# Altium PCB LineSensorBoardPCB.PcbDoc
Units mm, origin at the board's own origin, x right, y up, seen from the top; angles counter-clockwise.
Board outline 50 x 70 mm, 2 copper layers (Top Layer, Bottom Layer); 77 components, 53 nets, 266 pads, 6 vias.
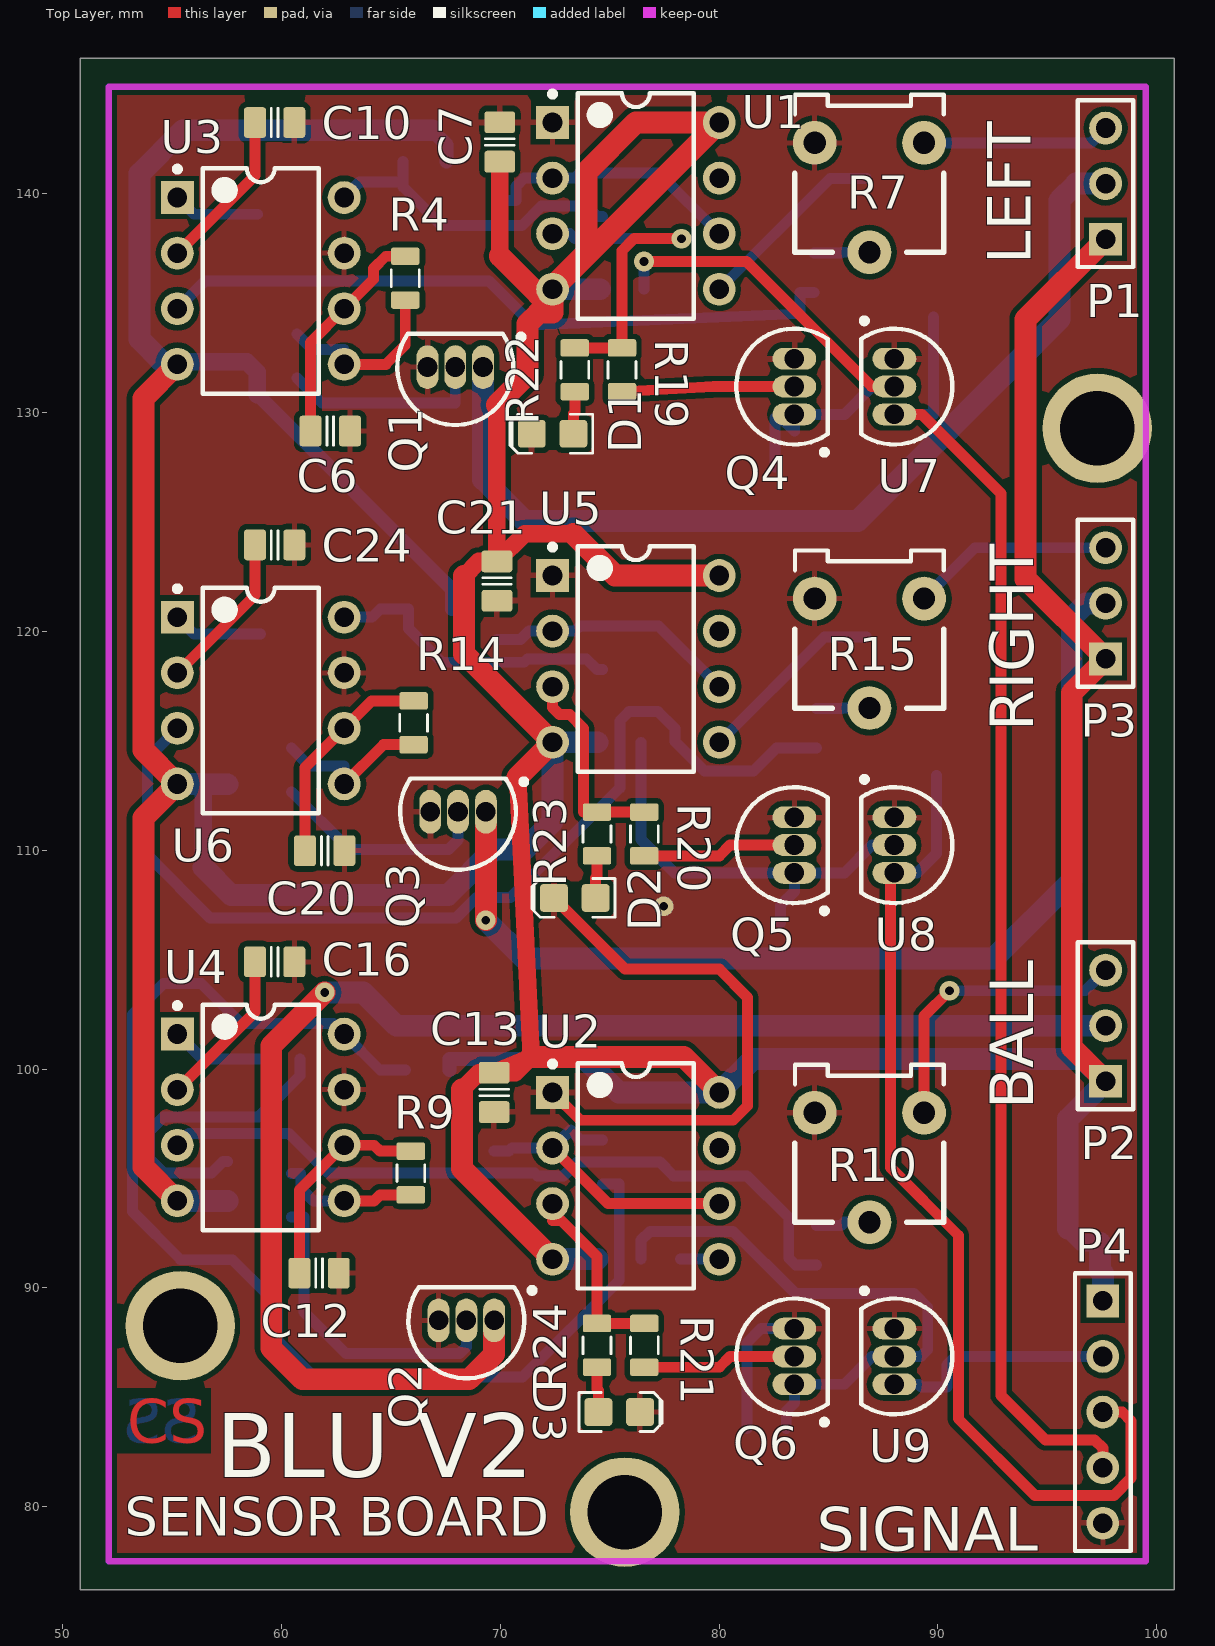
[diagram p0: Top Layer view]
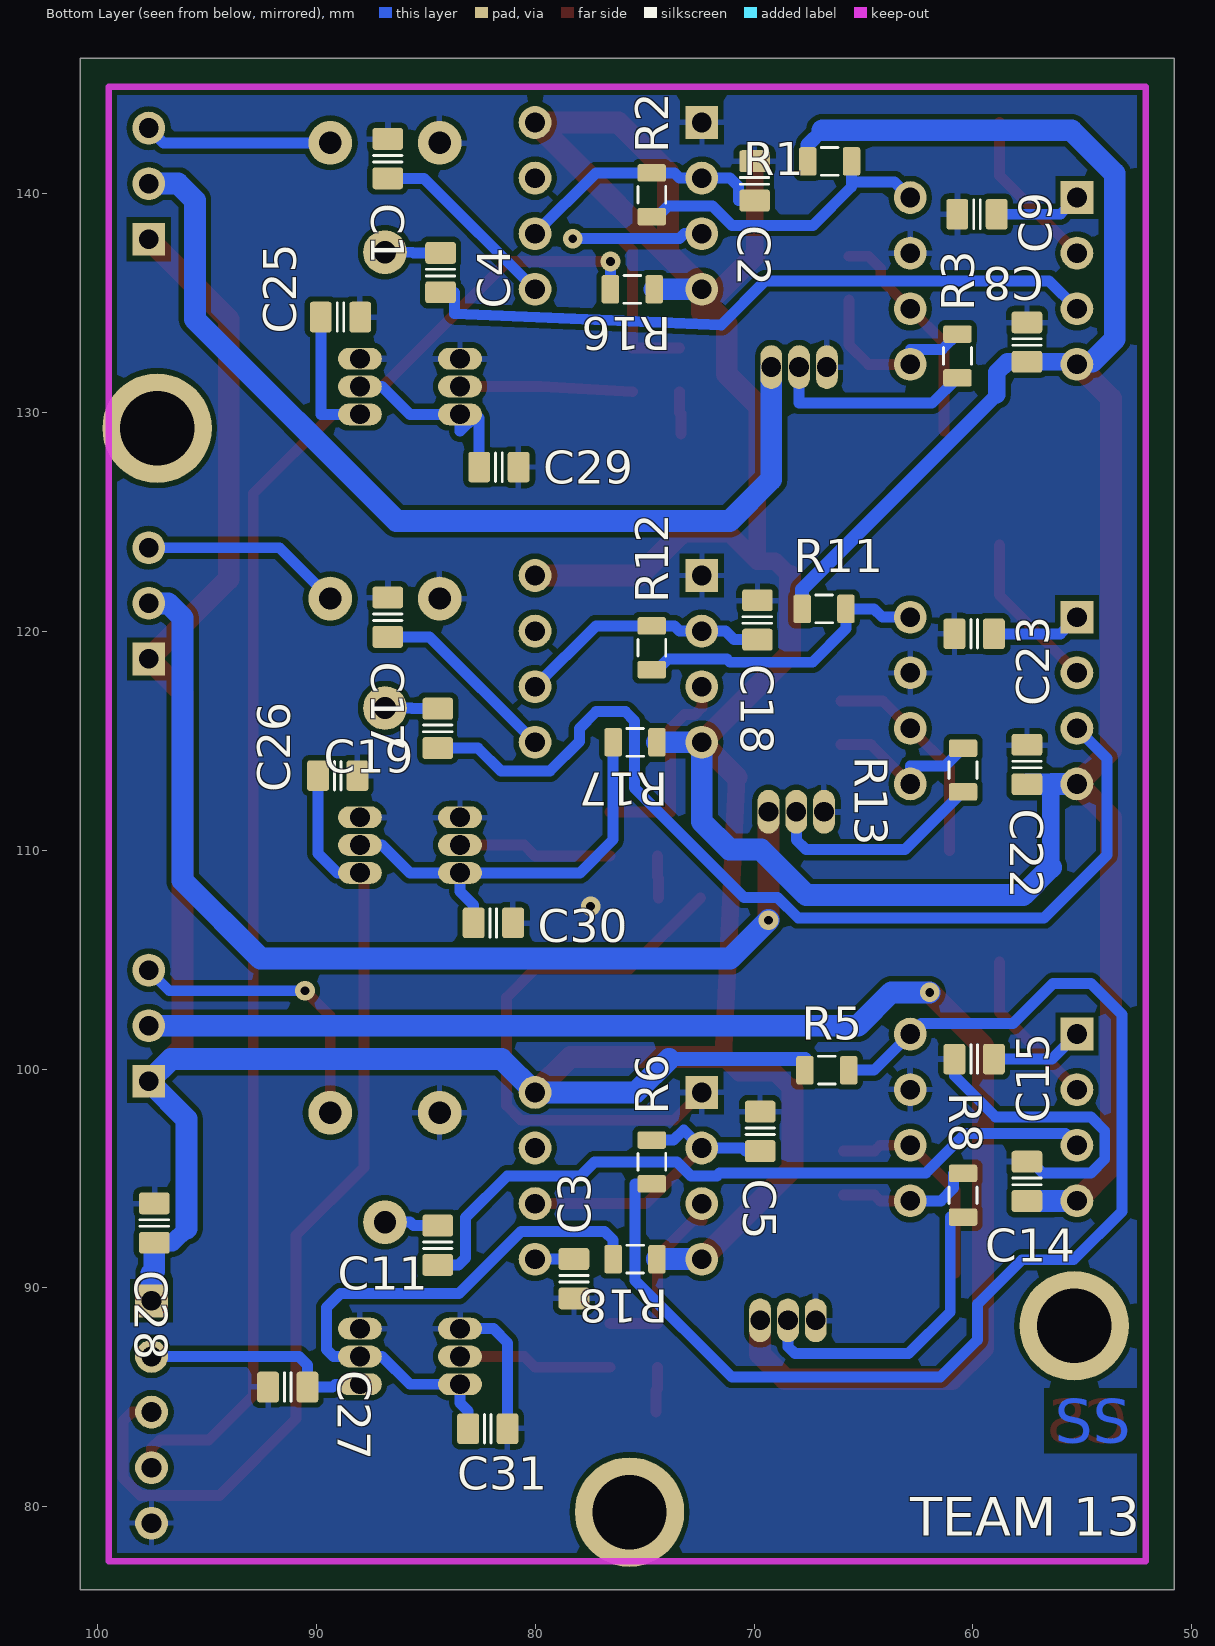
[diagram p1: Bottom Layer view, seen from below]
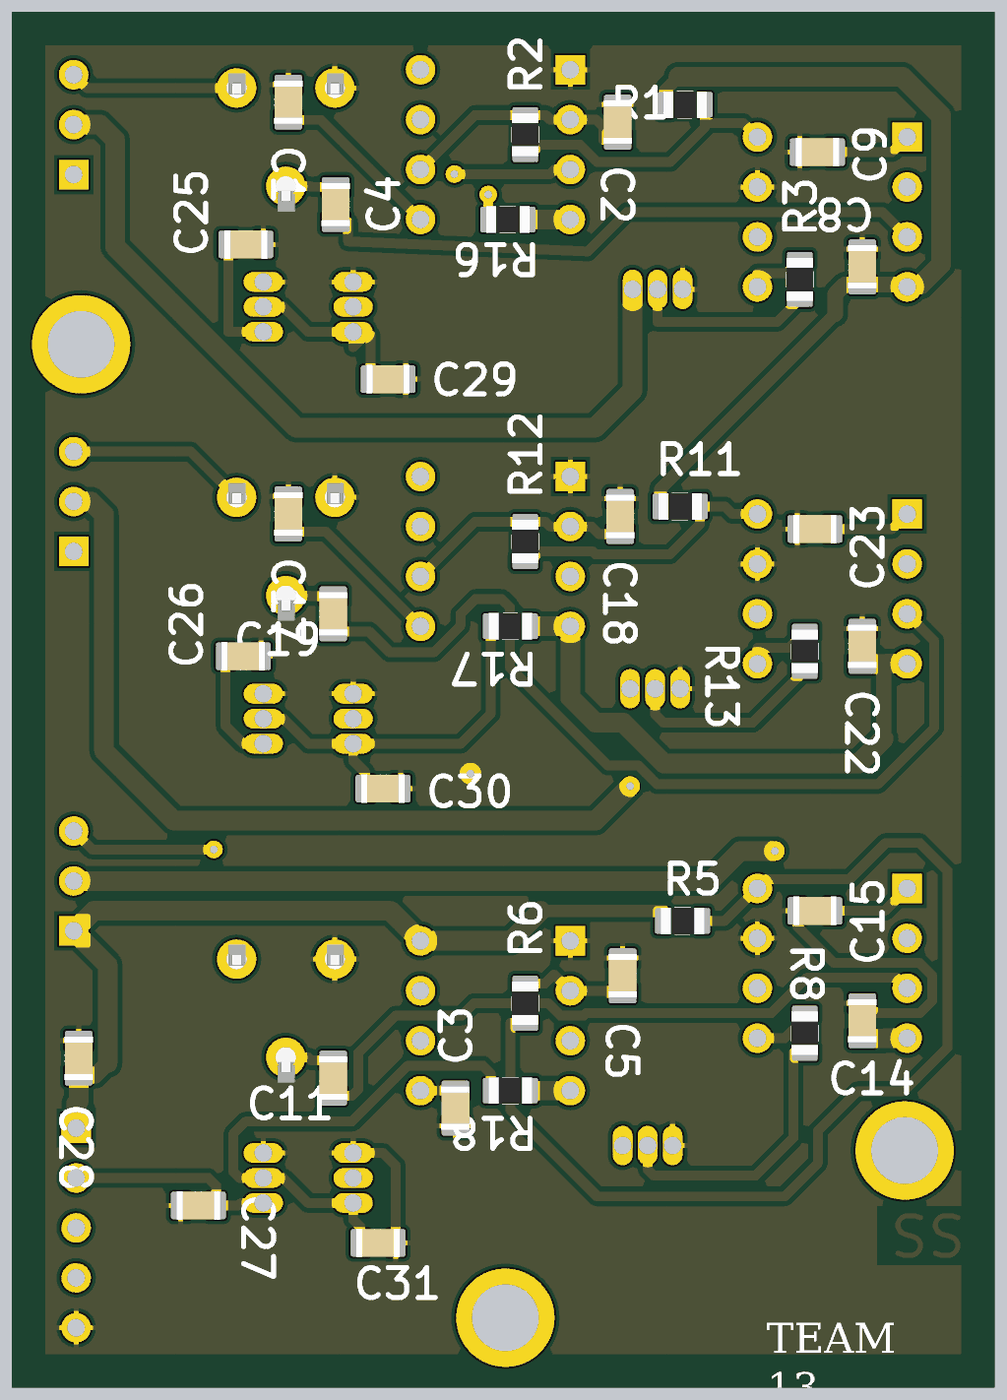
[diagram p2: 3D render of the assembled board from below, using the file's embedded part models]

## Layer stack, top to bottom
Top Solder: solder mask 0.0102, Solder Resist, Dk 3.5
Top Layer: signal copper 0.0356
Dielectric 1: dielectric 0.32, FR-4, Dk 4.8
Bottom Layer: signal copper 0.0356
Bottom Solder: solder mask 0.0102, Solder Resist, Dk 3.5

## Board outline
50.8,76.2 100.8,76.2 100.8,146.2 50.8,146.2

## Design rules (kind name [scope] priority, off if disabled: settings)
Clearance [All] p1: gap=0.25
PolygonConnect [All] p1: connectstyle=Relief reliefconductorwidth=0.254 reliefentries=4 polygonreliefangle="90 Angle" airgapwidth=0.254
RoutingVias [All] p1: holewidth=0.4 width=0.9 viastyle="Through Hole" minholewidth=0.711 minwidth=1.27 maxholewidth=0.711 maxwidth=1.27
SMDNeckDown [All] p1: percent=80.000
SolderMaskExpansion [All] p1: expansion=0.102
Width [(InNet('5V') OR InNet('NetP1_2') OR InNet('NetP2_2') OR InNet('NetP3_2'))] p1: maxlimit=1.5 minlimit=0.8 preferedwidth=1 minimp=50.000000 maximp=50.000000 favimp=50.000000
Width Width_All [All] p2: maxlimit=1.5 minlimit=0.3 preferedwidth=0.5 minimp=50.000000 maximp=50.000000 favimp=50.000000
30 further rules are at their usual default settings.

## Components (designator, comment, footprint, x,y, rotation, side; value= is the part's Value field where it differs from the comment)
C1 "approved sub OK" CAPC2012X135N 86.741,141.605 r90 bottom
C2 "approved sub OK" CAPC2012X135N 69.977,140.589 r90 bottom
C3 "approved sub OK" CAPC2012X135N 78.232,90.424 r270 bottom
C4 "approved sub OK" CAPC2012X135N 84.328,136.398 r90 bottom
C5 "approved sub OK" CAPC2012X135N 69.723,97.155 r90 bottom
C6 "approved sub OK" CAPC2012X135N 62.23,129.159 r0 top
C7 "approved sub OK" CAPC2012X135N 69.977,142.367 r90 top
C8 "approved sub OK" CAPC2012X135N 57.531,133.223 r90 bottom
C9 "approved sub OK" CAPC2012X135N 59.817,139.065 r0 bottom
C10 "approved sub OK" CAPC2012X135N 59.69,143.256 r0 top
C11 "approved sub OK" CAPC2012X135N 84.455,91.948 r90 bottom
C12 "approved sub OK" CAPC2012X135N 61.722,90.678 r0 top
C13 "approved sub OK" CAPC2012X135N 69.723,98.933 r270 top
C14 "approved sub OK" CAPC2012X135N 57.531,94.869 r90 bottom
C15 "approved sub OK" CAPC2012X135N 59.944,100.457 r0 bottom
C16 "approved sub OK" CAPC2012X135N 59.69,104.902 r0 top
C17 "approved sub OK" CAPC2012X135N 86.741,120.65 r90 bottom
C18 "approved sub OK" CAPC2012X135N 69.85,120.523 r90 bottom
C19 "approved sub OK" CAPC2012X135N 84.455,115.57 r90 bottom
C20 "approved sub OK" CAPC2012X135N 61.976,109.982 r0 top
C21 "approved sub OK" CAPC2012X135N 69.85,122.301 r270 top
C22 "approved sub OK" CAPC2012X135N 57.531,113.919 r90 bottom
C23 "approved sub OK" CAPC2012X135N 59.944,119.888 r0 bottom
C24 "approved sub OK" CAPC2012X135N 59.69,123.952 r0 top
C25 "approved sub OK" CAPC2012X135N 88.9,134.366 r180 bottom
C26 "approved sub OK" CAPC2012X135N 89.027,113.411 r180 bottom
C27 "approved sub OK" CAPC2012X135N 91.313,85.471 r0 bottom
C28 "approved sub OK" CAPC2012X135N 97.409,92.964 r90 bottom
C29 "approved sub OK" CAPC2012X135N 81.661,127.508 r180 bottom
C30 "approved sub OK" CAPC2012X135N 81.915,106.68 r180 bottom
C31 "approved sub OK" CAPC2012X135N 82.169,83.566 r180 bottom
D1 "INDLED" LED-0805-K 72.39,129.032 r180 top
D2 "INDLED" LED-0805-K 73.406,107.823 r180 top
D3 "INDLED" LED-0805-K 75.438,84.328 r0 top
P1 "LNS_MODULE_HEADER_L" HDR1X3 97.663,137.922 r90 top
P2 "PPP_MODULE_HEADER" HDR1X3 97.663,99.441 r90 top
P3 "LNS_MODULE_HEADER_R" HDR1X3 97.663,118.745 r90 top
P4 "Header 5" HDR1X5 97.536,89.408 r270 top
Q1 "2N2222" TO-226-AA 67.945,132.08 r90 top
Q2 "2N2222" TO-226-AA 68.453,88.519 r90 top
Q3 "2N2222" TO-226-AA 68.072,111.76 r90 top
Q4 "2N2222" TO-226-AA 83.439,131.191 r0 top
Q5 "2N2222" TO-226-AA 83.439,110.236 r0 top
Q6 "2N2222" TO-226-AA 83.439,86.868 r0 top
R1 "Thick Film" RESC2012X70N 66.548,141.478 r180 bottom
R2 "Thick Film" RESC2012X70N 74.676,139.954 r270 bottom
R3 "Thick Film" RESC2012X70N 60.706,132.588 r270 bottom
R4 "Thick Film" RESC2012X70N 65.659,136.144 r90 top
R5 "Thick Film" RESC2012X70N 66.675,99.949 r180 bottom
R6 "Thick Film" RESC2012X70N 74.676,95.758 r270 bottom
R7 "Single-turn pot" POT_3306F 86.868,139.827 r180 top
R8 "Thick Film" RESC2012X70N 60.452,94.234 r270 bottom
R9 "Thick Film" RESC2012X70N 65.913,95.25 r90 top
R10 "Single-turn pot" POT_3306F 86.868,95.504 r180 top
R11 "Thick Film" RESC2012X70N 66.802,121.031 r180 bottom
R12 "Thick Film" RESC2012X70N 74.676,119.253 r270 bottom
R13 "Thick Film" RESC2012X70N 60.452,113.665 r270 bottom
R14 "Thick Film" RESC2012X70N 66.04,115.824 r90 top
R15 "Single-turn pot" POT_3306F 86.868,118.999 r180 top
R16 "Thick Film" RESC2012X70N 75.565,135.636 r180 bottom
R17 "Thick Film" RESC2012X70N 75.438,114.935 r180 bottom
R18 "Thick Film" RESC2012X70N 75.438,91.313 r180 bottom
R19 "Thick Film" RESC2012X70N 75.565,131.953 r270 top
R20 "Thick Film" RESC2012X70N 76.581,110.744 r270 top
R21 "Thick Film" RESC2012X70N 76.581,87.376 r270 top
R22 "Thick Film" RESC2012X70N 73.406,131.953 r90 top
R23 "Thick Film" RESC2012X70N 74.422,110.744 r90 top
R24 "Thick Film" RESC2012X70N 74.422,87.376 r90 top
U1 "LM555CN/NOPB" N08E 76.2,139.446 r0 top
U2 "LM555CN/NOPB" N08E 76.2,95.123 r0 top
U3 "LM567CN/NOPB" N08E 59.055,136.017 r0 top
U4 "LM567CN/NOPB" N08E 59.055,97.79 r0 top
U5 "LM555CN/NOPB" N08E 76.2,118.745 r0 top
U6 "LM567CN/NOPB" N08E 59.055,116.84 r0 top
U7 "MCP1702-3302E/TO" TO-92-TO3 88.011,131.191 r180 top
U8 "MCP1702-3302E/TO" TO-92-TO3 88.011,110.236 r180 top
U9 "MCP1702-3302E/TO" TO-92-TO3 88.011,86.868 r180 top

## Footprints (in the part's own frame and the unit in brackets; to place one, negate y for a bottom-side part, rotate by r counter-clockwise, add the part's x,y. Pads: shape width x height; smd on the part's side, far side on the other; paste and mask are expansions set on the pad)
CAPC2012X135N [mm] "Chip Capacitor, Body 2.0x1.2mm, EIA 0805, IPC Medium Density"
  round 0.254 on Mech15: 0(0,0)
  rrect25% 1x1.4 smd: 1(-0.9,0) 2(0.9,0)
  Top Layer pour cut-out: -0.675,0.7 -0.475,0.9 0.475,0.9 0.675,0.7 0.675,-0.7 0.475,-0.9 -0.475,-0.9 -0.675,-0.7
  silkscreen extent -0.15,-0.65 0.15,0.65, body extent -1.1,-0.72 1.1,0.73, height 1.34
HDR1X3 [mm] "Connector; Header; 3 Position"
  rect 1.5x1.5 hole 0.9: 1(0,0)
  round 1.5 hole 0.9: 2(2.54,0) 3(5.08,0)
  silkscreen extent -1.27,-1.27 6.35,1.27
HDR1X5 [mm] "Connector; Header; 5 Position"
  rect 1.5x1.5 hole 0.9: 1(0,0)
  round 1.5 hole 0.9: 2(2.54,0) 3(5.08,0) 4(7.62,0) 5(10.16,0)
  silkscreen extent -1.27,-1.27 11.43,1.27
LED-0805-K [mil]
  round 20 on Mech15: 0(0,0)
  rrect25% 50x50 smd: A(-37.5,0) K(37.5,0)
  Top Layer pour cut-out: -15,30 15,30 15,-30 -15,-30
  silkscreen extent -72,-35 77,35, body extent -39,-25 39,25, height 31
N08E [mm] "DIP, 8-Pin, Row Spacing 7.62 mm, Pitch 2.54 mm"
  rect 1.5x1.5 hole 0.9: 1(-3.81,3.81)
  round 1.5 hole 0.9: 2(-3.81,1.27) 3(-3.81,-1.27) 4(-3.81,-3.81) 5(3.81,-3.81) 6(3.81,-1.27) 7(3.81,1.27) 8(3.81,3.81)
  silkscreen extent -3.93,-5.15 2.65,5.23, body extent -3.6,-5.15 3.6,5.15, height 5.33
POT_3306F [mm]
  round 2 hole 1.016: CCW(-2.5,-2.5) CW(2.5,-2.5) W(0,2.5)
  silkscreen extent -3.4,-4.7 3.4,2.5, body extent -3.4,-4.88 3.41,3.79, height 7.62
RESC2012X70N [mm] "Chip Resistor, Body 2.0x1.2mm, EIA 0805, IPC Medium Density"
  round 0.254 on Mech15: 0(0,0)
  rrect25% 0.8x1.3 smd: 1(-1,0) 2(1,0)
  Top Layer pour cut-out: -0.725,0.65 -0.525,0.85 0.525,0.85 0.725,0.65 0.725,-0.65 0.525,-0.85 -0.525,-0.85 -0.725,-0.65
  silkscreen extent -0.38,-0.64 0.38,0.64, body extent -1.1,-0.67 1.1,0.68, height 0.69
TO-92-TO3 [mm] "TO, Flat Index; 3 In-Line, Axial Leads; Body Dia. 4.8mm; Leads 0.56 x 0.53 mm (max)"
  oval 2x1 hole 0.9: 1(0,-1.27) 2(0,0) 3(0,1.27)
  silkscreen extent -2.65,-3.13 1.52,2.65, body extent -2.66,-2.66 1.52,2.66, height 5.33
TO-226-AA [mm] "TO, Flat Index; 3 In-Line, Axial Leads; Body Dia. 4.8mm; Leads 0.55 x 0.51 mm (max)"
  oval 2x1 hole 0.9: 1(0,-1.27) 2(0,0) 3(0,1.27)
  silkscreen extent -2.65,-3.13 1.52,2.65, body extent -2.66,-2.66 1.52,2.66, height 5.33

## Part data
C1 C2 C3 C4 C5 C6 C7 C8 C9 C10 C11 C12 C13 C14 C15 C16 C17 C18 C19 C20 C21 C22 C23 C24 C25 C26 C27 C28 C29 C30 C31: library part CAPC_1n8_50V_0805, "Capacitor SMD Cer 1.8nF 10% 50V X7R 0805"
D1 D2 D3: library part LED_SMD_Green_0805_6mcd, "LED, 0805 SMD, Green"
P1 P2 P3: library part "Header 3", "Header, 3-Pin"
P4: "Header, 5-Pin"
Q1 Q2 Q3 Q4 Q5 Q6: library part NPN, "NPN Bipolar Transistor"
R1 R2 R3 R4 R5 R6 R8 R9 R11 R12 R13 R14 R16 R17 R18 R19 R20 R21 R22 R23 R24: library part RES_150R_0805_5%, "Resistor SMD chip 150 Ohm 0.125W 5% 0805"
R7 R10 R15: library part RES_TRIMMER_10K_1T_THT, "Trimmer THD 10K 200mW Single-turn"
U1 U2 U5: library part CMP-0056-00016-2, "Timer, 8-pin MDIP, Pb-Free"
U3 U4 U6: library part CMP-0057-00046-2, "Tone Decoder, 8-pin MDIP, Pb-Free"
U7 U8 U9: library part CMP-0136-00017-1, "250 mA Low Quiescent Current LDO Regulator, 3-Pin TO-92, Extended TemperatureBAG"

## Free pads (board coordinates)
  round 5 hole 3.4: 0(55.372,88.265) 0(75.692,79.756) 0(97.282,129.286)

## Via types
v1: diameter 0.9, hole 0.4, Top Layer to Bottom Layer, 6 vias

## Nets (pads, with @x,y where several pads share a name; then routed paths per layer and width w, separated by ;. In a path a pad name is that pad's centre, name@x,y a point inside that pad or via, vN(x,y) a via of type N, cw(c..) or ccw(c..) an arc to the next point about the centre after c; other vN are vias at no path point)
5V: C7.1 C8.1 C13.1 C14.1 C21.1 C22.1 C28.1 P1.1 P2.1 P3.1 P4.1 R1.1 R5.1 R11.1 R16.2 R17.2 R18.2 U1.4 U1.8 U2.4 U2.8 U3.4 U4.4 U5.4 U5.8 U6.4 | length 314.9
  Top Layer w0.8: 68.25,99.06 69.023,99.833 C13.1 ; 68.351,122.53 69.023,123.201 C21.1 ; 69.85,130.353 C21.1 ; 69.977,137.16 C7.1 ; 70.79,113.335 71.414,100.559 ; 73.344,124.46 71.109,124.46 C21.1 ; C13.1 71.414,100.559 ; C13.1 70.688,99.833 71.414,100.559
  Top Layer w1: U4.4 53.696,95.529 53.696,111.481 U6.4 53.696,114.579 53.696,130.658 U3.4 ; 68.25,99.06 68.25,95.453 U2.4 ; 68.351,122.53 68.351,118.974 U5.4 70.79,113.335 ; 69.85,130.353 71.247,131.75 71.247,134.061 71.755,134.569 72.39,134.569 U1.4 U1.8 76.2,143.256 73.939,140.995 73.939,137.312 72.009,135.382 71.755,135.382 69.977,137.16 ; 71.414,100.559 78.384,100.559 U2.8 ; 73.344,124.46 75.249,122.555 U5.8 ; P2.1 96.114,100.99 96.114,117.196 P3.1 94.005,122.403 94.005,134.264 P1.1
  Bottom Layer w0.64: 58.903,130.819 67.802,121.92 R11.1 ; 66.888,142.9 67.548,142.24 R1.1 ; R5.1 67.675,100.457 73.889,100.457
  Bottom Layer w0.8: U3.4@54.545,132.323 U3.4@55.245,132.323 ; U3.4 U3.4@55.245,132.323 ; 56.439,109.22 56.439,113.019 56.577,113.019 ; 58.903,130.819 58.903,131.84 58.42,132.323 C8.1 56.577,132.323 U3.4@55.245,132.323 ; 95.936,92.71 96.582,92.064 C28.1
  Bottom Layer w1: U3.4@54.545,132.323 53.518,133.35 53.518,140.919 55.499,142.9 66.888,142.9 ; U4.4 56.363,93.98 56.374,93.969 C14.1 ; U6.4 56.363,113.03 56.374,113.019 56.439,113.019 ; 56.439,109.22 57.709,107.95 67.607,107.95 69.692,110.035 71.12,110.035 72.39,111.305 U5.4 R17.2 ; 56.577,113.019 C22.1 ; U2.4 R18.2 ; U1.4 R16.2 ; 73.889,100.457 75.413,98.933 U2.8 81.534,100.457 96.647,100.457 P2.1 95.936,97.714 95.936,92.71 ; C28.1 97.409,90.78 97.536,90.653 P4.1
555SIG_L: R19.1 R22.2 U1.3 | length 15.5
  Top Layer w0.5: R22.2 R19.1 75.565,137.397 76.116,137.947 v1(78.283,137.947)
  Bottom Layer w0.5: U1.3 73.177,138.176 73.406,137.947 v1(78.283,137.947)
555SIG_PPP: R21.1 R24.2 U2.3 | length 8.7
  Top Layer w0.5: U2.3 72.39,93.091 72.771,93.091 74.422,91.44 R24.2 R21.1
555SIG_R: R20.1 R23.2 U5.3 | length 9.4
  Top Layer w0.5: U5.3 72.39,116.522 72.707,116.205 73.177,116.205 73.812,115.57 73.812,111.744 R23.2 R20.1
GND: C1.2 C2.2 C3.2 C5.2 C6.2 C7.2 C8.2 C9.2 C10.2 C12.2 C13.2 C14.2 C15.2 C16.2 C17.2 C18.2 C20.2 C21.2 C22.2 C23.2 C24.2 C25.2 C26.2 C27.2 C28.2 C29.2 C30.2 C31.2 D1.K D2.K D3.K P4.5 Q1.3 Q2.3 Q3.3 Q4.3 Q5.3 Q6.3 R7.CW R10.CW R15.CW U1.1 U2.1 U3.7 U4.7 U5.1 U6.7 U7.1 U8.1 U9.1 | length 45.8
  Top Layer w0.5: U2.1 73.66,97.663 80.645,97.663 81.305,98.323 81.305,103.276 80.01,104.572 75.705,104.572 D2.K
  Bottom Layer w0.5: C14.2 57.328,95.769 56.809,95.25 54.61,95.25 53.975,95.885 53.975,97.175 54.61,97.81 58.959,97.81 60.844,99.695 C15.2 ; C31.2 81.269,87.492 81.915,88.138 Q6.3
  other v1: 77.47,107.442
LNS_L_SIG: C25.1 P4.4 U7.3 | length 60.3
  Top Layer w0.5: U7.3 89.265,129.921 92.888,126.298 92.888,85.09 94.92,83.058 97.155,83.058 97.536,82.677 P4.4
  Bottom Layer w0.5: U7.3 89.789,129.921 89.8,129.932 C25.1
LNS_R_SIG: C26.1 P4.3 U8.3 | length 46
  Top Layer w0.5: U8.3 87.833,108.966 87.833,95.504 90.932,92.405 90.932,84.023 94.437,80.518 98.044,80.518 98.831,81.305 98.831,83.922 98.425,84.328 P4.3
  Bottom Layer w0.5: U8.3 89.038,108.966 89.927,109.855 C26.1
NetC1_1: C1.1 U1.5 | length 8.8
  Bottom Layer w0.5: U1.5 85.079,140.705 C1.1
NetC2_1: C2.1 R2.1 U1.2 U1.6 | length 12.1
  Bottom Layer w0.5: C2.1 70.714,139.689 70.714,140.335 71.095,140.716 U1.2 73.406,140.716 73.644,140.954 R2.1 77.232,140.954 U1.6
NetC3_1: C3.1 U2.5 | length 1.8
  Bottom Layer w0.5: C3.1 79.096,91.324 79.107,91.313 U2.5
NetC4_1: C4.1 U3.3 | length 31.4
  Bottom Layer w0.5: U3.3 56.515,136.017 69.494,136.017 71.501,134.01 83.693,134.518 83.693,135.498 C4.1
NetC5_1: C5.1 R6.1 U2.2 U2.6 | length 14.2
  Top Layer w0.5: U2.2 74.93,93.853 U2.6
  Bottom Layer w0.5: C5.1 70.39,96.255 70.528,96.393 U2.2 73.215,97.218 73.675,96.758 R6.1
NetC6_1: C6.1 R4.2 U3.6 | length 10.3
  Top Layer w0.5: C6.1 61.33,133.212 U3.6 64.211,136.093 64.211,136.585 64.77,137.144 R4.2
NetC9_1: C9.1 U3.1 | length 4
  Bottom Layer w0.5: U3.1 56.007,139.065 C9.1
NetC10_1: C10.1 U3.2 | length 7.4
  Top Layer w0.5: U3.2 58.79,140.832 C10.1
NetC11_1: C11.1 U4.3 | length 33.5
  Bottom Layer w0.5: U4.3 55.778,97.053 60.35,97.053 62.154,95.25 71.577,95.25 71.704,95.123 72.888,95.123 73.523,95.758 77.292,95.758 77.927,95.123 81.28,95.123 83.185,93.218 83.185,91.365 83.502,91.048 C11.1
NetC12_1: C12.1 R9.2 U4.6 | length 9.8
  Top Layer w0.5: C12.1 60.822,94.477 U4.6 64.237,96.52 64.507,96.25 R9.2
NetC15_1: C15.1 U4.1 | length 4.3
  Bottom Layer w0.5: U4.1 56.388,100.457 C15.1
NetC16_1: C16.1 U4.2 | length 7.3
  Top Layer w0.5: U4.2 58.79,102.605 C16.1
NetC17_1: C17.1 U5.5 | length 8.7
  Bottom Layer w0.5: U5.5 84.825,119.75 C17.1
NetC18_1: C18.1 R12.1 U5.2 U5.6 | length 11.6
  Bottom Layer w0.5: C18.1 70.917,119.623 71.309,120.015 U5.2 73.406,120.015 73.644,120.253 R12.1 77.232,120.253 U5.6
NetC19_1: C19.1 U6.3 | length 45.7
  Bottom Layer w0.5: U6.3 53.873,114.198 53.873,109.779 56.744,106.909 67.983,106.909 68.923,107.848 70.46,107.848 75.463,112.852 75.463,115.913 75.882,116.332 77.216,116.332 77.978,115.57 77.978,114.971 79.335,113.614 81.57,113.614 82.626,114.67 C19.1
NetC20_1: C20.1 R14.2 U6.6 | length 10
  Top Layer w0.5: C20.1 61.076,113.781 U6.6 64.119,116.824 R14.2
NetC23_1: C23.1 U6.1 | length 4.1
  Bottom Layer w0.5: U6.1 56.007,119.888 C23.1
NetC24_1: C24.1 U6.2 | length 7.3
  Top Layer w0.5: U6.2 58.79,121.655 C24.1
NetC29_1: C29.1 Q4.1 R16.1 U7.2 | length 24.3
  Top Layer w0.5: v1(76.565,136.906) 81.26,136.906 86.975,131.191 U7.2
  Bottom Layer w0.5: R16.1 v1(76.565,136.906) ; C29.1 82.561,129.756 82.831,129.756 83.439,129.148 Q4.1 85.725,129.921 86.995,131.191 U7.2
NetC30_1: C30.1 Q5.1 R17.1 U8.2 | length 19.7
  Bottom Layer w0.5: R17.1 76.438,110.49 77.962,108.966 Q5.1 ; C30.1 82.815,107.493 83.439,108.117 Q5.1 ; U8.2 86.995,110.236 85.725,108.966 Q5.1
NetC31_1: C31.1 Q6.1 R18.1 U9.2 | length 26.4
  Bottom Layer w0.5: R18.1 76.438,92.186 76.835,92.583 80.645,92.583 83.49,89.738 88.9,89.738 89.535,89.103 89.535,87.185 89.218,86.868 U9.2 86.995,86.868 85.725,85.598 Q6.1 83.439,84.749 83.069,84.379 C31.1
NetD1_A: D1.A R22.1 | length 1.9
  Top Layer w0.5: D1.A 73.343,129.946 73.406,130.01 R22.1
NetD2_A: D2.A R23.1 | length 1.9
  Top Layer w0.5: D2.A 74.358,108.737 74.422,108.801 R23.1
NetD3_A: D3.A R24.1 | length 2.1
  Top Layer w0.5: R24.1 74.422,85.382 74.486,85.319 D3.A
NetP1_2: P1.2 Q1.1 | length 43.9
  Bottom Layer w1: Q1.1 69.215,126.949 71.12,125.044 86.335,125.044 95.555,134.264 95.555,139.7 96.317,140.462 P1.2
NetP1_3: P1.3 R7.CCW | length 8.6
  Bottom Layer w0.5: R7.CCW 96.988,142.327 P1.3
NetP2_2: P2.2 Q2.1 | length 66.4
  Top Layer w1: v1(61.976,103.505) 59.538,101.067 59.538,87.249 60.96,85.827 68.58,85.827 69.723,86.97 Q2.1
  Bottom Layer w1: v1(61.976,103.505) 63.729,103.505 65.253,101.981 P2.2
NetP2_3: P2.3 R10.CCW | length 13.6
  Top Layer w0.5: R10.CCW 89.368,102.424 v1(90.526,103.581)
  Bottom Layer w0.5: v1(90.526,103.581) 96.723,103.581 P2.3
NetP3_2: P3.2 Q3.1 | length 47.8
  Top Layer w1: v1(69.342,106.807) Q3.1
  Bottom Layer w1: v1(69.342,106.807) 71.095,105.054 92.558,105.054 96.114,108.61 96.114,120.625 96.774,121.285 P3.2
NetP3_3: P3.3 R15.CCW | length 9.3
  Bottom Layer w0.5: R15.CCW 91.694,123.825 P3.3
NetQ1_2: Q1.2 R3.2 | length 9.4
  Bottom Layer w0.5: R3.2 61.865,130.429 67.945,130.429 Q1.2
NetQ2_2: Q2.2 R8.2 | length 14.5
  Bottom Layer w0.5: R8.2 61.036,93.234 61.036,88.9 62.941,86.995 68.135,86.995 68.453,87.312 Q2.2
NetQ3_2: Q3.2 R13.2 | length 10.2
  Bottom Layer w0.5: R13.2 60.471,112.665 63.103,110.033 67.627,110.033 68.072,110.477 Q3.2
NetQ4_2: Q4.2 R19.2 | length 7.9
  Top Layer w0.5: R19.2 79.74,131.191 Q4.2
NetQ5_2: Q5.2 R20.2 | length 7.1
  Top Layer w0.5: R20.2 80.01,109.744 80.502,110.236 Q5.2
NetQ6_2: Q6.2 R21.2 | length 7.1
  Top Layer w0.5: R21.2 80.01,86.376 80.502,86.868 Q6.2
NetR1_2: R1.2 R2.2 U3.8 | length 14.6
  Bottom Layer w0.5: U3.8 63.576,140.538 65.548,140.538 ; R1.2 65.548,140.538 ; R2.2 74.422,138.954 73.93,139.446 71.892,139.446 71.003,138.557 67.31,138.557 65.548,140.319 65.548,140.538
NetR3_1: R3.1 R4.1 U3.5 | length 8.3
  Top Layer w0.5: U3.5 64.77,132.207 65.659,133.096 R4.1
  Bottom Layer w0.5: R3.1 61.401,132.893 62.865,132.893 U3.5
NetR5_2: R5.2 R6.2 U4.8 | length 57.1
  Bottom Layer w0.5: R5.2 64.516,99.949 U4.8 62.382,102.083 58.166,102.083 56.337,103.911 54.61,103.911 53.188,102.489 53.188,93.497 55.397,91.288 57.76,91.288 59.792,89.256 59.792,87.63 61.493,85.928 71.018,85.928 75.438,90.348 75.438,94.758 R6.2
NetR8_1: R8.1 R9.1 U4.5 | length 6.5
  Top Layer w0.5: U4.5 64.237,93.98 64.507,94.25 R9.1
  Bottom Layer w0.5: R8.1 60.884,95.234 60.884,94.564 61.468,93.98 U4.5
NetR11_2: R11.2 R12.2 U6.8 | length 13.8
  Bottom Layer w0.5: U6.8 64.135,120.65 64.516,121.031 R11.2 65.802,120.126 67.335,118.593 71.095,118.593 71.247,118.745 73.93,118.745 74.422,118.253 R12.2
NetR13_1: R13.1 R14.1 U6.5 | length 7.5
  Top Layer w0.5: U6.5 64.659,114.824 R14.1
  Bottom Layer w0.5: R13.1 61.274,113.843 62.865,113.843 U6.5
PPP_SIG: C27.1 P4.2 U9.3 | length 10.7
  Bottom Layer w0.5: U9.3 89.129,85.598 89.256,85.471 C27.1 90.413,86.476 90.805,86.868 P4.2
SENSE_SIG_L: C4.2 R7.W | length 2.6
  Bottom Layer w0.5: C4.2 85.573,137.298 85.602,137.327 R7.W
SENSE_SIG_PPP: C11.2 R10.W | length 2.5
  Bottom Layer w0.5: C11.2 85.573,92.848 85.729,93.004 R10.W
SENSE_SIG_R: C19.2 R15.W | length 2.4
  Bottom Layer w0.5: C19.2 85.623,116.47 85.652,116.499 R15.W
pads on no net: C1.0 C2.0 C3.0 C4.0 C5.0 C6.0 C7.0 C8.0 C9.0 C10.0 C11.0 C12.0 C13.0 C14.0 C15.0 C16.0 C17.0 C18.0 C19.0 C20.0 C21.0 C22.0 C23.0 C24.0 C25.0 C26.0 C27.0 C28.0 C29.0 C30.0 C31.0 D1.0 D2.0 D3.0 R1.0 R2.0 R3.0 R4.0 R5.0 R6.0 R8.0 R9.0 R11.0 R12.0 R13.0 R14.0 R16.0 R17.0 R18.0 R19.0 R20.0 R21.0 R22.0 R23.0 R24.0 U1.7 U2.7 U5.7

## Polygon pours and split planes (outlines as drawn)
GND on Bottom Layer "Bottom Layer-GND" (solid, pour order 2): 52.1,144.9 52.1,77.724 99.09,77.724 99.314,77.5 99.5,77.686 99.5,144.9 52.1,144.9
GND on Top Layer "Bottom Layer-GND" (solid, pour order 4): 52.1,144.9 52.1,77.5 99.5,77.5 99.5,144.9 52.1,144.9

## Keep-outs
Keep-Out Layer:
  lines w0.3: 52.1,77.5 52.1,144.9 99.5,144.9 99.5,77.5 52.1,77.5

## Other copper
Top Layer:
  text "CS" at 52.959,82.931 h2
Bottom Layer:
  text "SS" at 56.261,82.931 h2

## Silkscreen, mask and mechanical layers (free items; w line width, h text height)
Top Overlay:
  text "LEFT" at 94.234,136.779 h2 r90
  text "RIGHT" at 94.361,115.443 h2 r90
  text "BALL" at 94.361,98.171 h2 r90
  text "BLU V2" at 57.023,80.391 h5
  text "SENSOR BOARD" at 52.832,78.105 h3
  text "SIGNAL" at 84.455,77.978 h2
Bottom Overlay:
  text "TEAM 13" at 62.865,78.105 h3
Drill Drawing:
  text ".LEGEND" at 105.88,81.28 h1.52
  text "Drill Drawing." at 105.88,78.74 h1.52

## Dimensions
52.1,77.5 to 52.1,144.9 on Mechanical 1
52.1,77.5 to 99.5,77.5 on Mechanical 1